# Altium PCB CH32V205RCT-R0.PcbDoc (part 2 of 2)
Units mil, origin at the board's own origin, x right, y up, seen from the top; angles counter-clockwise.
Board outline 3070.87 x 2755.91 mil, 2 copper layers (Top Layer, Bottom Layer); 61 components, 80 nets, 323 pads, 493 vias.
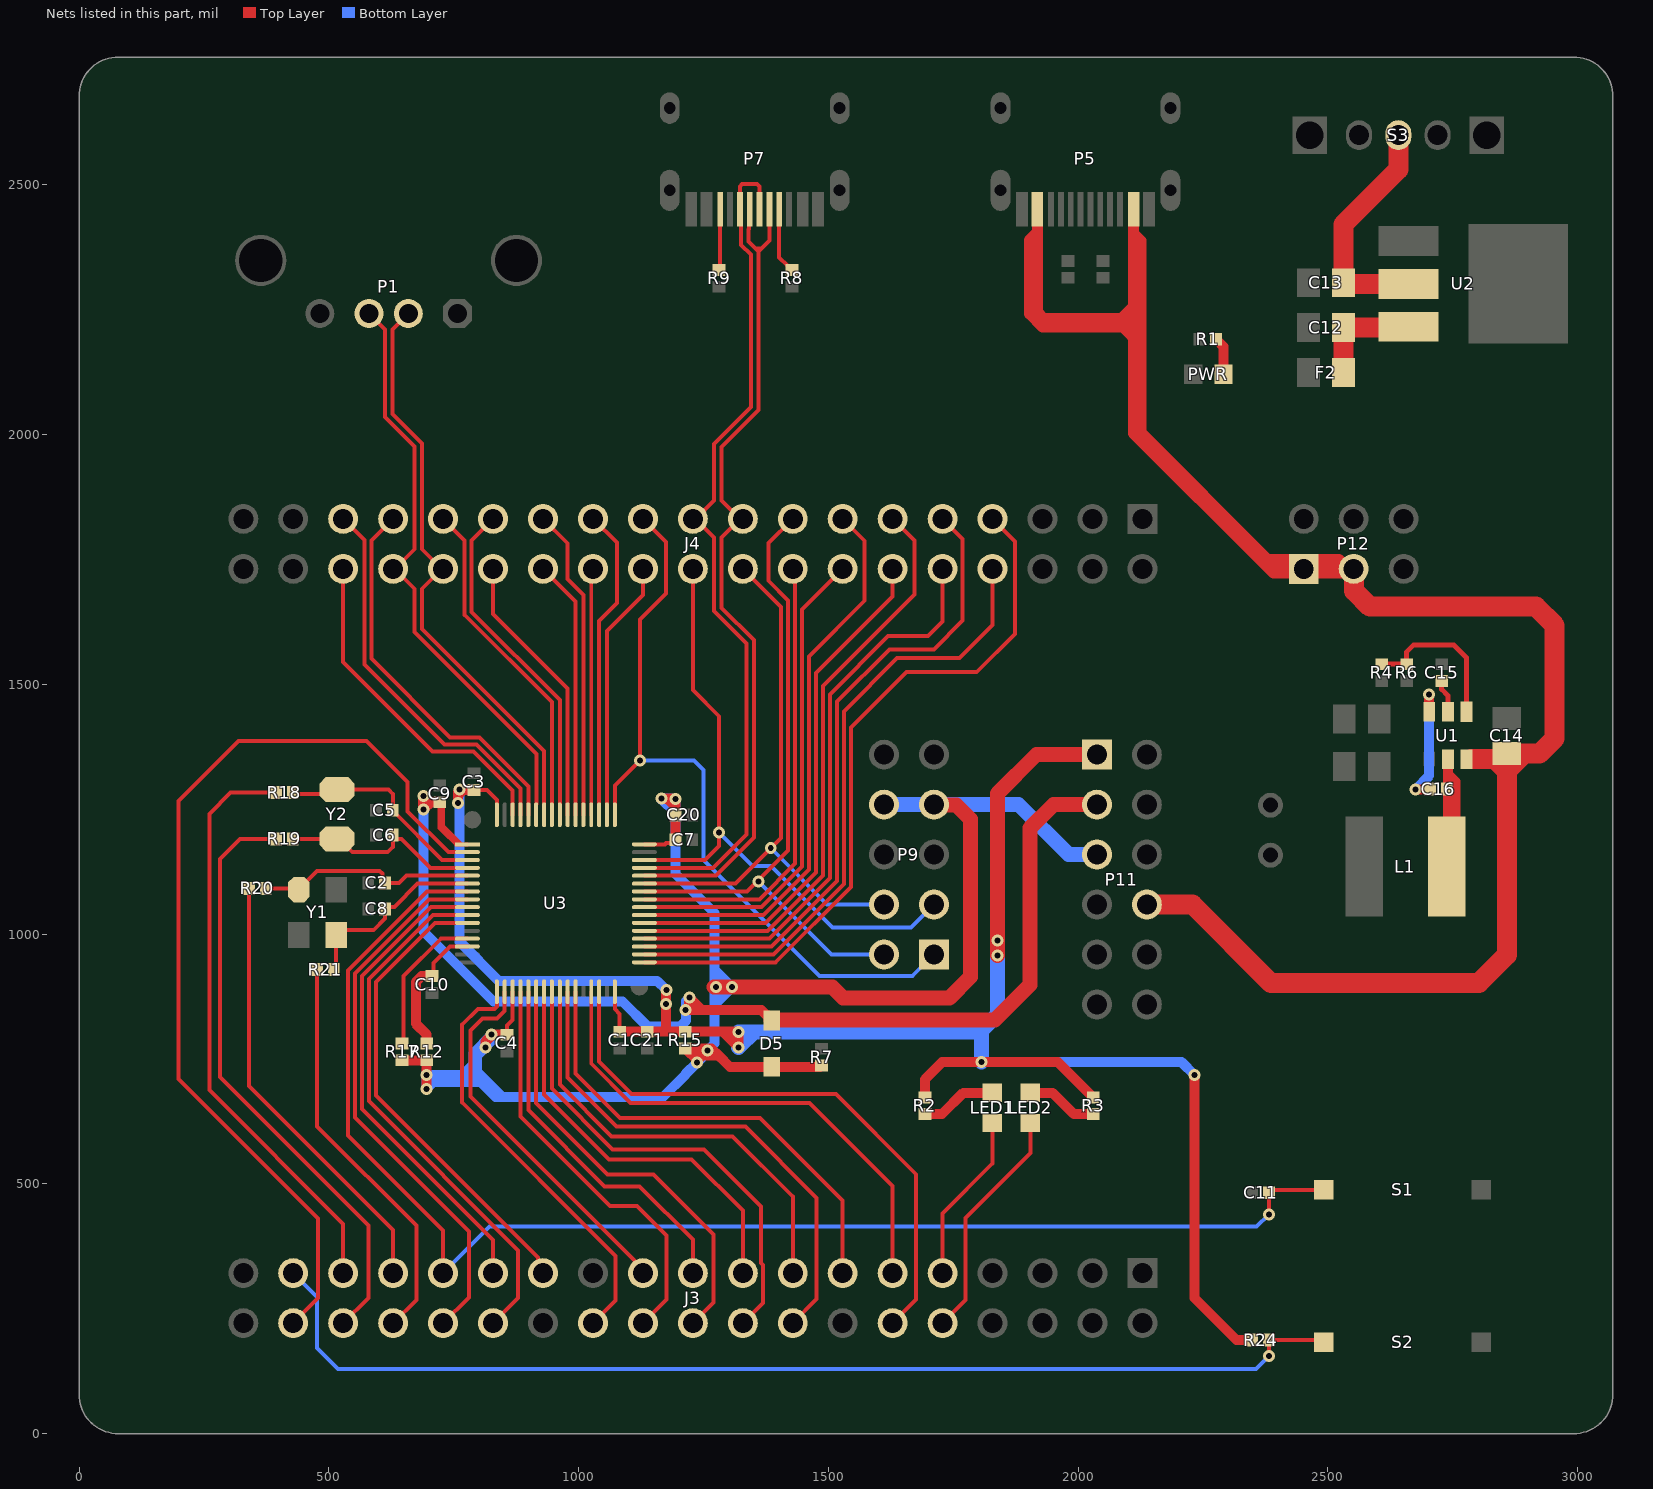
[diagram p2: the nets of this part, all layers, seen from the top]

## Via types
v1: diameter 24, hole 12, Top Layer to Bottom Layer, tented both sides, 493 vias

## Nets (pads, with @x,y where several pads share a name; then routed paths per layer and width w, separated by ;. In a path a pad name is that pad's centre, name@x,y a point inside that pad or via, vN(x,y) a via of type N, cw(c..) or ccw(c..) an arc to the next point about the centre after c; other vN are vias at no path point) (continued)
KEY: J3.35 R24.1 S2.1 | length 2246.9
  Top Layer w8: v1(2382.04,155.25) R24.1@2382.04,187.28 2487.79,187.28 S2.1@2492.11,182.96
  Bottom Layer w8: J3.35@428.86,321.33 476.91,273.28 476.91,171.2 518.47,129.63 2356.42,129.63 v1(2382.04,155.25)
LED1: J3.9 LED1.2 | length 341.6
  Top Layer w8: J3.9@1728.86,321.33 1728.86,441.1 1828.23,540.48 LED1.2@1828.23,621.8
LED2: J3.10 LED2.2 | length 473.2
  Top Layer w8: J3.10@1728.86,221.33 1774.99,267.46 1774.99,431.98 1904.5,561.49 LED2.2@1904.5,621.8
NetC12_1: C12.1 F2.2 U2.3 | length 220.7
  Top Layer w40: F2.2@2531.31,2124.06 C12.1@2531.31,2214.06 2659.33,2214.06 U2.3@2661.23,2215.95
NetC13_1: C13.1 S3.1 U2.2 | length 471.7
  Top Layer w40: S3.1@2641.13,2599.52 2641.13,2530.79 2531.31,2420.97 C13.1@2531.31,2304.06 2533.41,2301.95 U2.2@2661.23,2301.95
NetC15_2: C15.2 U1.5 | length 67.2
  Top Layer w10: C15.2@2727.91,1506.93 2727.91,1490.24 2740.31,1477.84 U1.5@2740.31,1444.88
NetC16_1: C16.1 L1.1 U1.2 | length 411.4
  Top Layer w20: L1.1@2737.91,1135.39 L1.1@2740.31,1137.79 ; U1.2@2740.31,1350.39 2740.31,1320.63 ; L1.1@2740.31,1137.79 2755.43,1152.91 2755.43,1305.51 2740.31,1320.63 ; L1.1@2740.31,1137.79 2740.31,1320.63
NetC16_2: C16.2 U1.6 | length 264.6
  Top Layer w20: v1(2675.47,1289.69) 2675.82,1290.04 2704.1,1290.04 C16.2@2704.45,1290.39 ; U1.6@2702.91,1444.88 v1(2702.91,1479.27)
  Bottom Layer w20: v1(2675.47,1289.69) 2702.91,1317.13 v1(2702.91,1479.27)
NetLED1_1: LED1.1 R2.2 | length 152.5
  Top Layer w20: R2.2@1693.43,639.68 1727.44,639.68 1770.19,682.43 LED1.1@1828.23,682.43
NetLED2_1: LED2.1 R3.2 | length 143.5
  Top Layer w20: LED2.1@1904.5,682.43 1948.67,682.43 1991.42,639.68 R3.2@2030.28,639.68
NetP7_A5: P7.A5 R8.2 | length 132.5
  Top Layer w8: P7.A5@1401.75,2450.82 1401.75,2355 1418.5,2338.24 1418.5,2337.25 1426.31,2329.44 R8.2@1427.3,2329.44
NetP7_B5: P7.B5 R9.2 | length 122.3
  Top Layer w8: R9.2@1281.3,2329.44 1283.64,2331.78 P7.B5@1283.64,2450.82
NetPWR_1: PWR.1 R1.1 | length 76.8
  Top Layer w20: R1.1@2276.31,2191.02 2276.31,2190.03 2278.12,2188.22 2279.1,2188.22 2291.31,2176.02 PWR.1@2291.31,2121.02
NetR4_1: R4.1 R6.2 U1.4 | length 319.3
  Top Layer w10: R4.1@2607.91,1540.39 R6.2@2657.91,1540.39 2657.91,1565.24 2671.3,1578.63 2752.69,1578.63 2777.72,1553.6 U1.4@2777.72,1444.88
NRST: C11.2 J3.29 S1.1 U3.7 | length 2846.8
  Top Layer w8: J3.29@728.86,321.33 728.86,406.77 538.77,596.87 538.77,927.46 696.77,1085.46 U3.7@777.42,1085.46 ; v1(2382.04,438.82) C11.2@2382.04,482.24 2387.96,488.17 S1.1@2492.11,488.17
  Bottom Layer w8: J3.29@728.86,321.33 821.82,414.28 2357.51,414.28 v1(2382.04,438.82)
PA2: J3.24 U3.17 | length 857.7
  Top Layer w8: U3.17@836.48,884.68 836.48,855.23 831.79,850.54 798.29,850.54 767.21,819.46 767.21,663 1074.31,355.9 1074.31,266.77 J3.24@1028.86,221.33
PA3: J3.21 U3.18 | length 751.8
  Top Layer w8: U3.18@852.23,884.68 852.23,846.49 837.25,831.51 807.94,831.51 783.81,807.39 783.81,675.18 1128.86,330.14 J3.21@1128.86,321.33
PA4: J3.22 U3.20 | length 835.3
  Top Layer w8: U3.20@883.72,884.68 883.72,863.68 883.63,863.58 883.63,635.34 1062.88,456.08 1116.61,456.08 1175.81,396.88 1175.81,268.27 J3.22@1128.86,221.33
PA5: J3.19 U3.21 | length 740.8
  Top Layer w8: U3.21@899.47,884.68 899.47,648.04 1052.3,495.2 1122.35,495.2 1228.86,388.69 J3.19@1228.86,321.33
PA6: J3.20 U3.22 | length 881.3
  Top Layer w8: U3.22@915.22,884.68 915.22,661.86 1058.12,518.96 1149.94,518.96 1270.16,398.74 1270.16,262.62 J3.20@1228.86,221.33
PA7: J3.17 U3.23 | length 824.9
  Top Layer w8: U3.23@930.97,884.68 930.97,679.13 1061.03,549.07 1226.2,549.07 1328.86,446.41 J3.17@1328.86,321.33
PA8: J4.16 U3.41 | length 923.3
  Top Layer w8: U3.41@1131.75,1069.72 1362.09,1069.72 1433.36,1140.98 1433.36,1726.83 J4.16@1428.86,1731.33
PA9: J4.15 P9.2 U3.42 | length 1333.4
  Top Layer w8: U3.42@1131.75,1085.46 1337.68,1085.46 1419.36,1167.14 1419.36,1668.26 1380.14,1707.48 1380.14,1782.61 J4.15@1428.86,1831.33
  Bottom Layer w8: v1(1360.56,1105.04) 1506.37,959.23 P9.2@1611.51,959.23
PA10: J4.18 P9.4 U3.43 | length 1155.1
  Top Layer w8: U3.43@1131.75,1101.21 1313.89,1101.21 1405.09,1192.41 1405.09,1655.1 J4.18@1328.86,1731.33
  Bottom Layer w8: v1(1384.79,1172.11) 1497.67,1059.23 P9.4@1611.51,1059.23
PA11: J4.17 P7.A7 P7.B7 U3.44 | length 1715.6
  Top Layer w8: U3.44@1131.75,1116.96 1152.75,1116.96 1153.13,1117.33 1275.09,1117.33 1351.07,1193.31 1351.07,1588.44 1286.36,1653.15 1286.36,1794.2 J4.17@1323.48,1831.33 ; J4.17@1328.86,1831.33 J4.17@1323.48,1831.33 ; P7.A7@1342.69,2450.82 1340.79,2448.91 1340.79,2411.27 1340.35,2410.84 1340.35,2386.13 1354.13,2372.35 ; 1364.67,2373.01 1354.79,2373.01 1354.13,2372.35 ; P7.B7@1382.06,2450.82 1382.06,2388.47 1360.04,2366.44 ; J4.17@1323.48,1831.33 1322.92,1831.33 1286.36,1867.89 1286.36,1975.28 1360.04,2048.96 1360.04,2366.44 ; 1354.13,2372.35 1360.04,2366.44
PA12: J4.19 P7.A6 P7.B6 U3.45 | length 1721.8
  Top Layer w8: U3.45@1131.75,1132.71 1152.75,1132.71 1153.13,1132.33 1268.87,1132.33 1336.07,1199.53 1336.07,1582.23 1271.36,1646.94 1271.36,1794.2 J4.19@1234.24,1831.33 ; J4.19@1228.86,1831.33 J4.19@1234.24,1831.33 ; P7.B6@1323.01,2450.82 1324.91,2448.85 1324.91,2411.27 1325.35,2410.84 1325.35,2379.92 1345.04,2360.23 1345.04,2055.17 1271.36,1981.5 1271.36,1867.89 1234.8,1831.33 J4.19@1234.24,1831.33 ; P7.B6@1323.01,2450.82 1323.01,2496.95 1327.69,2501.63 1357.52,2501.63 1362.38,2496.78 P7.A6@1362.38,2450.82
PA13: J4.20 P9.3 U3.46 | length 1265.7
  Top Layer w8: U3.46@1131.75,1148.46 1253.03,1148.46 1281.48,1176.91 1281.48,1436.19 1228.86,1488.8 J4.20@1228.86,1731.33
  Bottom Layer w8: v1(1281.48,1203.56) 1348.54,1136.51 1384.97,1136.51 1508.28,1013.2 1665.48,1013.2 P9.3@1711.51,1059.23
PA14: J4.21 P9.1 U3.49 | length 1545.2
  Top Layer w8: U3.49@1072.7,1239.01 1072.7,1297.78 v1(1122.93,1348.01) 1122.93,1630.31 1174.94,1682.32 1174.94,1785.24 J4.21@1128.86,1831.33
  Bottom Layer w8: v1(1122.93,1348.01) 1230.71,1348.01 1249.73,1328.99 1249.73,1148.39 1482.33,915.79 1668.07,915.79 P9.1@1711.51,959.23
PA15: J4.22 U3.50 | length 522.1
  Top Layer w8: U3.50@1056.95,1239.01 1056.95,1606.67 1128.86,1678.58 J4.22@1128.86,1731.33
PB0: J3.16 U3.26 | length 1040.5
  Top Layer w8: U3.26@978.21,884.68 978.21,712.7 1076.4,614.51 1333.79,614.51 1476.77,471.53 1476.77,269.24 J3.16@1428.86,221.33
PB1: J3.13 U3.27 | length 949.3
  Top Layer w8: U3.27@993.96,884.68 993.96,721.02 1083.05,631.93 1363.69,631.93 1528.86,466.76 J3.13@1528.86,321.33
PB3: J4.28 U3.55 | length 554.2
  Top Layer w8: J4.28@828.86,1731.33 828.86,1640.7 978.21,1491.35 U3.55@978.21,1239.01
PB4: J4.27 U3.56 | length 683.2
  Top Layer w8: J4.27@828.86,1831.33 785.97,1788.43 785.97,1645.18 962.46,1468.68 U3.56@962.46,1239.01
PB5: J4.29 U3.57 | length 682.6
  Top Layer w8: J4.29@728.86,1831.33 771.97,1788.22 771.97,1639.38 946.71,1464.63 U3.57@946.71,1239.01
PB6: J4.32 P1.3 U3.59 | length 1178.4
  Top Layer w8: P1.3@580.49,2242.44 612.36,2210.57 612.36,2034.96 671.36,1975.96 671.36,1770.54 632.14,1731.33 J4.32@631.46,1731.33 ; J4.32@628.86,1731.33 J4.32@631.46,1731.33 ; U3.59@915.22,1239.01 915.22,1260.01 915.59,1260.38 915.59,1360.6 671.36,1604.83 671.36,1691.43 J4.32@631.46,1731.33
PB7: J4.30 P1.2 U3.58 | length 1178.4
  Top Layer w8: P1.2@659.23,2242.44 627.36,2210.57 627.36,2041.17 686.36,1982.17 686.36,1770.54 725.58,1731.33 J4.30@726.26,1731.33 ; J4.30@728.86,1731.33 J4.30@726.26,1731.33 ; U3.58@930.97,1239.01 930.97,1260.01 930.59,1260.38 930.59,1366.81 686.36,1611.05 686.36,1691.43 J4.30@726.26,1731.33
PB8: J4.31 U3.60 | length 774.6
  Top Layer w8: J4.31@628.86,1831.33 585.44,1787.9 585.44,1551.47 742.93,1393.98 801.31,1393.98 899.47,1295.82 U3.60@899.47,1239.01
PB9: J4.33 U3.61 | length 776.9
  Top Layer w8: J4.33@528.86,1831.33 571.44,1788.75 571.44,1551.06 571.44,1539.95 731.41,1379.98 742.53,1379.98 795.51,1379.98 883.72,1291.77 U3.61@883.72,1239.01
PB10: J3.11 U3.29 | length 1023.3
  Top Layer w8: U3.29@1025.45,884.68 1025.45,740.74 1103.89,662.3 1462.34,662.3 1628.86,495.79 J3.11@1628.86,321.33
PB11: J3.12 U3.30 | length 1185.6
  Top Layer w8: U3.30@1041.2,884.68 1041.2,744.79 1105.77,680.23 1515.09,680.23 1675.99,519.33 1675.99,268.46 J3.12@1628.86,221.33
PB12: J4.7 U3.33 | length 1450.1
  Top Layer w8: U3.33@1131.75,943.73 1394.5,943.73 1545.36,1094.59 1545.36,1413.79 1656.2,1524.63 1797.16,1524.63 1873.86,1601.33 1873.86,1786.33 J4.7@1828.86,1831.33
PB13: J4.8 U3.34 | length 1285.1
  Top Layer w8: U3.34@1131.75,959.48 1390.45,959.48 1531.36,1100.39 1531.36,1446.04 1637.7,1552.37 1762.21,1552.37 1828.86,1619.03 J4.8@1828.86,1731.33
PB14: J4.9 U3.35 | length 1338
  Top Layer w8: U3.35@1131.75,975.23 1266.74,975.23 1266.78,975.18 1386.35,975.18 1517.36,1106.19 1517.36,1465.48 1622.04,1570.16 1711.23,1570.16 1768.86,1627.79 1768.86,1791.33 J4.9@1728.86,1831.33
PB15: J4.10 U3.36 | length 1180.9
  Top Layer w8: U3.36@1131.75,990.98 1382.35,990.98 1503.36,1111.99 1503.36,1479.94 1619.91,1596.49 1699.22,1596.49 1728.86,1626.12 J4.10@1728.86,1731.33
PC0: J3.30 U3.8 | length 1102.1
  Top Layer w8: J3.30@728.86,221.33 780.62,273.09 780.62,404.85 552.77,632.7 552.77,921.67 700.82,1069.72 U3.8@777.42,1069.72
PC1: J3.27 U3.9 | length 971
  Top Layer w8: U3.9@777.42,1053.97 704.87,1053.97 566.77,915.87 566.77,649.81 828.86,387.72 J3.27@828.86,321.33
PC2: J3.28 U3.10 | length 1083
  Top Layer w8: U3.10@777.42,1038.22 708.92,1038.22 580.77,910.07 580.77,665.53 879.29,367.01 879.29,271.75 J3.28@828.86,221.33
PC3: J3.25 U3.11 | length 952.9
  Top Layer w8: U3.11@777.42,1022.47 712.97,1022.47 594.77,904.27 594.77,676.57 918.91,352.43 918.91,331.28 J3.25@928.86,321.33
PC4: J3.18 U3.24 | length 962.1
  Top Layer w8: U3.24@946.71,884.68 946.71,690.55 1068.06,569.21 1251.23,569.21 1365.44,455 1365.44,341.32 1368.86,337.89 1368.86,261.33 J3.18@1328.86,221.33
PC5: J3.15 U3.25 | length 898.3
  Top Layer w8: U3.25@962.46,884.68 962.46,699.33 1066.42,595.37 1308.37,595.37 1428.86,474.88 J3.15@1428.86,321.33
PC6: J4.11 U3.37 | length 1211.1
  Top Layer w8: U3.37@1131.75,1006.72 1378.3,1006.72 1489.36,1117.79 1489.36,1496.53 1672.56,1679.73 1672.56,1787.63 J4.11@1628.86,1831.33
PC7: J4.12 U3.38 | length 1056.8
  Top Layer w8: U3.38@1131.75,1022.47 1374.25,1022.47 1475.36,1123.58 1475.36,1522.37 1628.86,1675.87 J4.12@1628.86,1731.33
PC8: J4.13 U3.39 | length 1133.8
  Top Layer w8: U3.39@1131.75,1038.22 1370.2,1038.22 1461.36,1129.38 1461.36,1556.04 1572.95,1667.63 1572.95,1787.23 J4.13@1528.86,1831.33
PC9: J4.14 U3.40 | length 979.1
  Top Layer w8: U3.40@1131.75,1053.97 1366.15,1053.97 1447.36,1135.18 1447.36,1649.82 J4.14@1528.86,1731.33
PC10: J4.23 U3.51 | length 626.7
  Top Layer w8: J4.23@1028.86,1831.33 1076.59,1783.59 1076.59,1662.49 1041.2,1627.1 U3.51@1041.2,1239.01
PC11: J4.24 U3.52 | length 493.7
  Top Layer w8: U3.52@1025.45,1239.01 1025.45,1727.92 J4.24@1028.86,1731.33
PC12: J4.25 U3.53 | length 625.8
  Top Layer w8: J4.25@928.86,1831.33 977.67,1782.51 977.67,1711.41 1009.71,1679.38 U3.53@1009.71,1239.01
PC13: J3.36 U3.2 | length 1936.5
  Top Layer w8: J3.36@428.86,221.33 478.86,271.33 478.86,431.06 199.54,710.38 199.54,1266.94 319.55,1386.95 575.65,1386.95 657.83,1304.77 657.83,1245.66 739.29,1164.2 U3.2@777.42,1164.2
PC14: J3.33 R18.2 | length 1181.6
  Top Layer w8: R18.2@394.59,1283.28 303.41,1283.28 261.02,1240.9 261.02,687.83 528.86,419.99 J3.33@528.86,321.33
PC15: J3.34 R19.1 | length 1202.2
  Top Layer w8: R19.1@394.59,1190.61 322.36,1190.61 282.12,1150.37 282.12,713.84 579.28,416.68 579.28,271.75 J3.34@528.86,221.33
PD0: J3.31 R20.1 | length 889.8
  Top Layer w8: R20.1@340.33,1091.64 340.33,695.93 628.86,407.4 J3.31@628.86,321.33
PD1: J3.32 R21.1 | length 809.3
  Top Layer w8: R21.1@476.67,929.07 476.67,615.01 675.37,416.32 675.37,267.83 J3.32@628.86,221.33
PD2: J4.26 U3.54 | length 519.3
  Top Layer w8: J4.26@928.86,1731.33 993.96,1666.23 U3.54@993.96,1239.01
PE0: J4.34 U3.62 | length 681
  Top Layer w8: J4.34@528.86,1731.33 528.86,1544.6 707.48,1365.98 789.71,1365.98 867.97,1287.71 U3.62@867.97,1239.01
VBAT: C9.1 D5.1 P11.3 U3.1 | length 2480.3
  Top Layer w8: U3.1@763.84,1181.83 729.11,1216.57 ; U3.1@777.42,1179.95 754.87,1179.95 729.11,1205.71 ; 729.11,1205.71 729.11,1216.57 ; 729.11,1205.71 722,1212.81 C9.1@722,1264.07 729.11,1256.96 729.11,1216.57
  Top Layer w20: v1@688.9,1267.33 688.9,1250.29 v1(689.67,1249.53) 704.21,1264.07 ; v1(689.67,1276.75) 690.75,1276.75 692.75,1274.75 693.52,1274.75 704.21,1264.07 ; 695.64,1264.07 704.21,1264.07 ; C9.1@722,1264.07 704.21,1264.07 ; D5.1@1385.41,828.53 1385.41,831.88 1380.46,836.82 1377.12,836.82 1365.87,848.07 1245.14,848.07 ; 1245.14,848.07 v1(1214.37,848.07) 1214.37,849.15 1221.01,855.78 1221.01,872.17 v1(1221.77,872.93) 1245.14,849.56 1245.14,848.07
  Top Layer w30: D5.1@1385.41,828.53 1833.81,828.53 1903.8,898.52 1903.8,1212.39 1950.64,1259.23 P11.3@2037.77,1259.23
  Bottom Layer w20: v1(689.67,1249.53) 689.67,1005.1 829.62,865.15 1088.04,865.15 1137.66,815.53 1203.9,815.53 1215.62,827.24 v1@1215.62,843.99 ; v1(1214.37,848.07) 1215.14,847.3 1215.14,844.48 v1@1215.62,843.99 ; v1(1221.77,872.93) 1221.77,871.85 1215.62,865.7 v1@1215.62,843.99
VBUS_CC: C14.2 P5.A4 P5.B4 P11.8 P12.1 P12.3 U1.3 | length 5232.2
  Top Layer w22: P5.B4@1918.39,2450.82 1918.39,2405.93 ; P5.A4@2111.31,2450.82 2111.31,2403.07 ; P12.1@2451.79,1731.33 P12.1@2445.52,1737.6 ; P12.3@2560.52,1722.52 P12.3@2552.67,1722.52 ; C14.2@2852.91,1350.39 C14.2@2858.22,1355.7 ; 1918.39,2405.93 1918.39,2245.76 1931.28,2232.87 2087.22,2232.87 ; 1918.39,2405.93 1902.46,2390 1902.46,2241.94 1929.13,2215.28 2089.44,2215.28 ; 2087.22,2232.87 2099.26,2232.87 ; 2087.22,2232.87 2099.26,2244.92 ; 2089.44,2215.28 2099.26,2225.09 2099.26,2232.87 ; 2089.44,2215.28 2107.84,2196.88 2111.31,2196.88 ; 2099.26,2232.87 2099.26,2244.92 ; 2099.26,2232.87 2110.69,2232.87 2111.31,2233.49 ; 2099.26,2244.92 2111.31,2256.96 ; 2111.31,2196.88 2111.31,2233.49 ; 2111.31,2196.88 2111.31,2002.17 2375.88,1737.6 ; 2111.31,2233.49 2111.31,2256.96 ; 2111.31,2256.96 2111.31,2403.07 ; 2111.31,2403.07 2126.27,2388.1 2126.27,2003.9 2379.77,1750.39 2419.91,1750.39 ; 2375.88,1737.6 2390.96,1722.52 P12.3@2552.67,1722.52 ; 2375.88,1737.6 P12.1@2445.52,1737.6 ; 2419.91,1750.39 2522.44,1750.39 P12.3@2535.24,1737.6 ; 2419.91,1750.39 2419.97,1750.33 2432.79,1750.33 P12.1@2445.52,1737.6 ; P12.1@2445.52,1737.6 P12.3@2535.24,1737.6 ; P12.3@2535.24,1737.6 2541.51,1731.33 P12.3@2551.79,1731.33 ; P12.3@2535.24,1737.6 2545.52,1737.6 P12.3@2551.79,1731.33 ; P12.3@2551.79,1731.33 2552.67,1730.45 P12.3@2552.67,1722.52
  Top Layer w30: C14.2@2858.22,1355.7 C14.2@2858.22,1361.78
  Top Layer w40: P11.8@2137.77,1059.23 2228.93,1059.23 2385.82,902.35 2802.19,902.35 2858.22,958.38 2858.22,1326.8 ; P12.3@2552.67,1722.52 2552.67,1687.11 2584.14,1655.64 2916.75,1655.64 2954.16,1618.23 2954.16,1391.77 2924.17,1361.78 2893.2,1361.78 ; U1.3@2786.72,1350.39 C14.2@2834.63,1350.39 ; C14.2@2858.22,1355.7 C14.2@2858.22,1350.39 ; C14.2@2858.22,1361.78 2893.2,1361.78 ; C14.2@2861.91,1350.39 C14.2@2858.22,1350.39 ; C14.2@2834.63,1350.39 2858.22,1326.8 ; C14.2@2834.63,1350.39 2852.91,1350.39 C14.2@2858.22,1350.39 ; 2858.22,1326.8 2893.2,1361.78 ; 2858.22,1326.8 C14.2@2858.22,1350.39
VDD: C4.2 C7.2 C20.1 D5.2 P9.7 P9.8 P11.5 R7.2 R12.2 R15.2 R17.1 U3.19 U3.48 | length 4162.3
  Top Layer w8: C4.2@856.6,798.8 856.6,816.74 867.97,828.12 U3.19@867.97,884.68 ; U3.48@1131.75,1179.95 1173.05,1179.95 1175.34,1182.24 1187.82,1182.24 C7.2@1194.37,1188.79
  Top Layer w20: R17.1@646.72,747.51 695.91,747.51 R12.2@696.03,747.39 ; v1(695.42,690.05) 696.03,690.66 R12.2@696.03,747.39 ; v1(695.48,718.09) 695.75,718.37 695.75,747.12 R12.2@696.03,747.39 ; v1(813.29,773.17) 814.05,773.94 814.05,785.58 826.2,797.72 v1(826.2,798.8) C4.2@856.6,798.8 ; C7.2@1194.37,1188.79 C20.1@1194.37,1238.79 1194.37,1254.64 ; R15.2@1213.77,771.21 R15.2@1214.76,771.21 ; v1(1258.44,767.32) 1248.06,756.94 ; 1284.76,752.72 1280.54,756.94 ; R7.2@1486.65,736.96 1485.67,736.96 1482.94,734.23 D5.2@1386.8,734.23 1303.25,734.23 1280.54,756.94 ; 1194.37,1254.64 v1(1194.37,1270.5) 1193.64,1271.23 v1(1165.77,1271.23) 1166.53,1270.46 1178.55,1270.46 1194.37,1254.64 ; R15.2@1214.76,771.21 1240.51,771.21 ; R15.2@1214.76,771.21 1216.57,769.4 1216.57,768.42 1236.14,748.84 1236.14,743.51 v1(1236.91,742.74) ; v1(1236.91,742.74) 1236.91,767.61 1240.51,771.21 ; v1(1236.91,742.74) 1237.67,743.51 1237.67,746.55 1248.06,756.94 ; 1240.51,771.21 1266.26,771.21 1280.54,756.94 ; 1248.06,756.94 1280.54,756.94
  Top Layer w30: v1@1271.19,894.1 1508.09,894.1 1529.83,872.36 1742.65,872.36 1784.27,913.98 1784.27,1230.36 1756.49,1258.14 1712.6,1258.14 P9.7@1711.51,1259.23
  Bottom Layer w20: v1(826.2,798.8) v1@825.43,798.04 ; v1@1259.75,766.02 1259.71,766.06 1259.71,768.67 1272.08,781.04 1272.08,858.36 ; v1@1259.95,765.82 v1(1236.91,742.74) 1214.46,720.33 1214.46,719.24 1169.06,673.84 847.9,673.84 ; 709.44,704.07 723.46,718.09 ; 709.44,704.07 v1(695.42,690.05) 695.42,718.03 v1(695.48,718.09) 723.46,718.09 ; 709.44,704.07 803.63,704.07 ; 723.46,718.09 767.55,718.09 ; 767.55,718.09 789.61,718.09 ; 767.55,718.09 789.61,740.15 ; 789.61,718.09 789.61,740.15 ; 789.61,718.09 803.63,704.07 ; 789.61,740.15 789.61,749.49 ; 789.61,749.49 796.87,756.76 ; 789.61,749.49 789.61,762.22 v1@825.43,798.04 ; 796.87,756.76 v1(813.29,773.17) 813.29,774.26 825.43,786.4 v1@825.43,798.04 ; 796.87,756.76 796.87,724.87 847.9,673.84 ; 803.63,704.07 833.86,673.84 847.9,673.84 ; 1194.37,1242.63 v1(1165.77,1271.23) 1193.64,1271.23 v1(1194.37,1270.5) 1194.37,1242.63 ; 1194.37,1242.63 1194.37,1120.29 1272.08,1042.58 1272.08,929.1 ; 1272.08,858.36 1272.08,894.1 1272.08,929.1 ; 1272.08,858.36 1289.76,876.04 ; 1272.08,929.1 1289.76,911.41 ; 1289.76,876.04 v1(1307.45,893.73) 1289.76,911.41 ; 1289.76,876.04 1289.76,911.41
  Bottom Layer w30: P9.8@1611.51,1259.23 P9.7@1711.51,1259.23 1881.12,1259.23 1981.12,1159.23 P11.5@2037.77,1159.23
  other v1: 1275.19,894.1
VDDA: C10.1 R12.1 U3.14 | length 275.6
  Top Layer w8: C10.1@709.7,919.7 709.7,942.16 742.77,975.23 U3.14@777.42,975.23
  Top Layer w20: R12.1@696.03,780.86 696.03,798.95 674.21,820.77 674.21,904.2 685.93,915.92 C10.1@708.71,915.92
VIO: C1.2 C3.2 C21.2 P11.1 R2.1 R3.1 R15.1 R24.2 U3.32 U3.64 | length 4254.5
  Top Layer w8: C3.2@790.46,1288.68 816.46,1288.68 836.48,1268.66 U3.64@836.48,1239.01 ; U3.32@1072.7,884.68 1072.7,850.28 1082.46,840.52 C1.2@1082.46,804.68
  Top Layer w20: v1(758.43,1262.71) 758.43,1277.47 ; v1(762.03,1289.68) v1@762.03,1288.68 ; C3.2@790.46,1288.68 v1@769.64,1288.68 ; C1.2@1082.46,804.68 C21.2@1137.46,804.68 1175.62,804.68 ; v1(1175.89,887.93) 1175.13,887.16 1175.13,884.34 1174.75,883.96 v1(1174.75,859.83) 1174.75,805.55 1175.62,804.68 ; R2.1@1693.43,673.15 1693.43,709.33 1727.8,743.7 v1(1807.17,743.7) 1959.73,743.7 2027.48,675.94 2027.48,674.96 2029.29,673.15 R3.1@2030.28,673.15 ; v1(2233.01,718.16) 2233.01,271.58 2317.31,187.28 R24.2@2348.57,187.28 ; 758.43,1277.47 v1@769.64,1288.68 ; 758.43,1277.47 758.43,1284.99 762.03,1288.6 v1@762.03,1288.68 ; v1@762.03,1288.68 v1@769.64,1288.68 ; 1175.62,804.68 R15.1@1213.77,804.68 1289.53,804.68 ; 1289.53,804.68 v1(1320.67,773.54) v1(1320.67,804.16) 1320.15,804.68 1289.53,804.68
  Top Layer w30: v1(1838.71,957.01) 1838.71,1281.58 1916.37,1359.23 P11.1@2037.77,1359.23
  Bottom Layer w20: v1@762.03,1288.68 762.03,1262.71 762.03,984.75 840.4,906.38 1157.44,906.38 v1(1175.89,887.93) ; v1(1174.75,859.83) 1175.1,860.18 v1@1175.1,887.93 ; v1(1807.17,743.7) 2207.47,743.7 v1(2233.01,718.16)
  Bottom Layer w30: 1358.72,804.16 1351.29,804.16 ; v1(1807.17,743.7) 1807.07,743.79 1807.07,804.16 ; v1@1838.71,986.94 v1(1838.71,957.01) 1838.71,838.95 1807.07,807.31 1807.07,804.16 ; 1351.29,804.16 v1(1320.67,773.54) v1(1320.67,804.16) 1351.29,804.16 ; 1351.29,804.16 1807.07,804.16
  other v1: 1838.98,986.94
VREF+: R17.2 U3.13 | length 293.9
  Top Layer w8: R17.2@646.72,780.98 R17.2@648.01,782.26 ; R17.2@650.01,782.26 650.01,915.83 725.15,990.98 U3.13@777.42,990.98
X32KI: C5.1 R18.1 U3.3 Y2.1 | length 437.5
  Top Layer w8: R18.1@421.59,1280.22 507.57,1280.22 Y2.1@516.59,1289.24 619.5,1289.24 628.09,1280.64 628.09,1247.24 726.88,1148.46 U3.3@777.42,1148.46
X32KO: C6.1 R19.2 U3.4 Y2.2 | length 407
  Top Layer w8: R19.2@436.86,1190.81 Y2.2@516.59,1190.81 520.72,1190.81 547.57,1163.95 617.29,1163.95 628.09,1174.76 C6.1@628.09,1198.4 635.78,1190.71 645.98,1190.71 704.01,1132.68 U3.4@756.39,1132.68 ; U3.4@756.42,1132.71 U3.4@777.42,1132.71
XI: C2.2 R20.2 U3.5 Y1.1 | length 445.7
  Top Layer w8: R20.2@373.8,1091.64 437.37,1091.64 Y1.1@440.12,1088.89 ; Y1.1@441.2,1091.4 476.39,1126.59 601.55,1126.59 607.17,1120.97 C2.2@607.17,1096.6 ; C2.2@612.39,1102.49 640.68,1102.49 655.16,1116.96 U3.5@777.42,1116.96
XO: C8.2 R21.2 U3.6 Y1.3 | length 376.1
  Top Layer w8: R21.2@512.13,929.07 514.92,931.86 Y1.3@514.92,998.34 525.25,1008.67 590.03,1008.67 612.39,1031.03 C8.2@612.39,1050.5 ; C8.2@621.53,1054.72 631.39,1054.72 677.88,1101.21 U3.6@777.42,1101.21
pads on no net: P5.A6 P5.A7 P5.A8 P5.B6 P5.B7 P5.B8 P7.A8 P7.B8 S3.0 S3.2 U2. U3.0

## Polygon pours and split planes (outlines as drawn)
GND on Bottom Layer "GND" (solid, remove dead copper, pour order 1): -9.11,2761.83 -9.11,1.26 3076.53,1.26 3076.53,2756.83
GND on Top Layer "GND" (solid, remove dead copper, pour order 0): -0.82,2762.19 -0.82,-2.69 3068.63,-2.69 3068.63,2754.23

## Keep-outs
Keep-Out Layer:
  the board outline again, w10

## Other copper
Top Layer:
  pour cut-out: 1864.47,1270.71 1864.47,1211.27 1928.21,1211.27 1928.21,1271.38
  pour cut-out: 2534.12,1253.22 2534.12,1015.76 2775.83,1015.76 2775.83,1253.22
  region net +5V: 2359.29,1184.2 2446.62,1184.2 2482.22,1219.8 2482.22,1440.07 2504.78,1462.63 2548.66,1462.63 2553.98,1457.31 2553.98,1299.34 2611.27,1242.05 2611.27,1061.27 2599.03,1049.04 2554.53,1049.04 2497.8,1105.77 2368.19,1105.77 2350.39,1123.57 2350.39,1176.97

## Silkscreen, mask and mechanical layers (free items; w line width, h text height)
Top Overlay:
  lines w10: 2451.79,1642.44 2451.79,1664.97 ; 2451.79,1897.68 2451.79,1920.21 ; 2551.79,1642.44 2551.79,1664.97 ; 2551.79,1897.68 2551.79,1920.21
  text "ON" at 2510.74,2452.05 h35
  text "OFF" at 2678.62,2452.05 h35
  text "USBFS" at 1237.35,2194.96 h78.74
  text "USBHS" at 495.05,2078.86 h78.74
  text "PC12" at 911.26,2028.16 h35 r270
  text "PC10" at 1011.32,2028.16 h35 r270
  text "PA14" at 1111.37,2028.16 h35 r270
  text "PA12" at 1211.43,2028.16 h35 r270
  text "PB14" at 1711.71,2028.16 h35 r270
  text "PB12" at 1811.77,2028.16 h35 r270
  text "PA11" at 1311.49,2016.49 h35 r270
  text "GND" at 310.92,1999 h35 r270
  text "GND" at 410.98,1999 h35 r270
  text "PB9" at 511.03,1999 h35 r270
  text "PB8" at 611.09,1999 h35 r270
  text "PB5" at 711.15,1999 h35 r270
  text "PB4" at 811.2,1999 h35 r270
  text "PA9" at 1411.54,1999 h35 r270
  text "PC8" at 1511.6,1999 h35 r270
  text "PC6" at 1611.65,1999 h35 r270
  text "GND" at 1911.82,1999 h35 r270
  text "VCC" at 2011.88,1999 h35 r270
  text "VCC" at 2111.94,1999 h35 r270
  text "+5V" at 2448.02,1940.4 h35
  text "GND" at 2610.71,1891.22 h35
  text "GND" at 310.92,1662.41 h35 r270
  text "GND" at 410.98,1662.41 h35 r270
  text "PE0" at 511.03,1662.41 h35 r270
  text "PB6" at 611.09,1662.41 h35 r270
  text "PB7" at 711.15,1662.41 h35 r270
  text "PB3" at 811.2,1662.41 h35 r270
  text "PD2" at 911.26,1662.41 h35 r270
  text "PC11" at 1011.32,1662.41 h35 r270
  text "PA15" at 1111.37,1662.41 h35 r270
  text "PA13" at 1211.43,1662.41 h35 r270
  text "PA10" at 1311.49,1662.41 h35 r270
  text "PA8" at 1411.54,1662.41 h35 r270
  text "PC9" at 1511.6,1662.41 h35 r270
  text "PC7" at 1611.65,1662.41 h35 r270
  text "PB15" at 1711.71,1662.41 h35 r270
  text "PB13" at 1811.77,1662.41 h35 r270
  text "GND" at 1911.82,1662.41 h35 r270
  text "VCC" at 2011.88,1662.41 h35 r270
  text "VCC" at 2111.94,1662.41 h35 r270
  text "GND" at 2610.71,1616.93 h35
  text "VBUS_CC" at 2373,1589.35 h35
  text "CH32V205RCT-R0-1v0" at 37.46,1363.42 h35 r270
  text "3V3" at 2200.65,1346.74 h35
  text "VIO" at 1893.89,1342.11 h35
  text "+5V" at 1439.92,1335.88 h35
  text "+5V" at 1762.77,1335.11 h35
  text "VDD" at 1762.77,1260.57 h35
  text "3V3" at 2200.65,1249.43 h35
  text "VDD" at 1439.92,1235.82 h35
  text "VBAT" at 1853.07,1219.17 h35
  text "GND" at 1762.77,1138.01 h35
  text "VDD" at 1888.06,1136.88 h35
  text "GND" at 1439.92,1135.76 h35
  text "3V3" at 2199.41,1131.06 h35
  text "3V3" at 1935.71,1103.18 h35 r270
  text "RXD" at 1439.92,1035.71 h35
  text "SWIO" at 1762.77,1032 h35
  text "VBUS_CC" at 2214.29,1021.26 h35
  text "GND" at 1935.71,995.65 h35 r270
  text "TXD" at 1439.92,935.65 h35
  text "SWCK" at 1762.77,935.65 h35
  text "+5V" at 2210.69,933.88 h35
  text "GND" at 1935.71,875.72 h35 r270
  text "+5V" at 2210.69,840.28 h35
  text "BOOT1" at 1909.85,546.66 h35 r270
  text "NRST" at 712.51,523.33 h35 r270
  text "PC14" at 512.95,517.5 h35 r270
  text "PB10" at 1610.52,517.5 h35 r270
  text "LED1" at 1710.3,511.67 h35 r270
  text "GND" at 313.4,488.34 h35 r270
  text "KEY" at 413.18,488.34 h35 r270
  text "PD0" at 612.73,488.34 h35 r270
  text "PC3" at 912.07,488.34 h35 r270
  text "PA3" at 1111.62,488.34 h35 r270
  text "PA5" at 1211.4,488.34 h35 r270
  text "PA7" at 1311.18,488.34 h35 r270
  text "PC5" at 1410.96,488.34 h35 r270
  text "GND" at 1810.07,488.34 h35 r270
  text "VCC" at 2009.63,488.34 h35 r270
  text "VCC" at 2109.41,488.34 h35 r270
  text "PC1" at 812.29,476.68 h35 r270
  text "PA1" at 1011.85,476.68 h35 r270
  text "PB1" at 1510.74,476.68 h35 r270
  text "GND" at 313.4,147 h35 r270
  text "PC13" at 413.18,147 h35 r270
  text "PC15" at 512.95,147 h35 r270
  text "PD1" at 612.73,147 h35 r270
  text "PC0" at 712.51,147 h35 r270
  text "PC2" at 812.29,147 h35 r270
  text "PA0" at 912.07,147 h35 r270
  text "PA2" at 1011.85,147 h35 r270
  text "PA4" at 1111.62,147 h35 r270
  text "PA6" at 1211.4,147 h35 r270
  text "PC4" at 1311.18,147 h35 r270
  text "PB0" at 1410.96,147 h35 r270
  text "PB2" at 1510.74,147 h35 r270
  text "PB11" at 1610.52,147 h35 r270
  text "LED2" at 1710.3,147 h35 r270
  text "GND" at 1810.07,147 h35 r270
  text "GND" at 1909.85,147 h35 r270
  text "VCC" at 2009.63,147 h35 r270
  text "VCC" at 2109.41,147 h35 r270
Mechanical 1:
  the board outline again, w10

## Text inside footprints (layer, text, board x,y; h text height)
LED1: Top Overlay "+" at 1817.25,720.51 h40
LED2: Top Overlay "+" at 1893.51,720.51 h40
P1: Top Overlay "D-" at 697.66,2362.44 h40 r180; Top Overlay "D+" at 607.66,2362.44 h40 r180; Top Overlay "V" at 777.66,2362.44 h40 r180; Top Overlay "G" at 497.66,2362.44 h40 r180
PWR: Top Overlay "+" at 2329.38,2132.01 h40 r270